# EAGLE board P27_v3 (EAGLE 7.1.0)
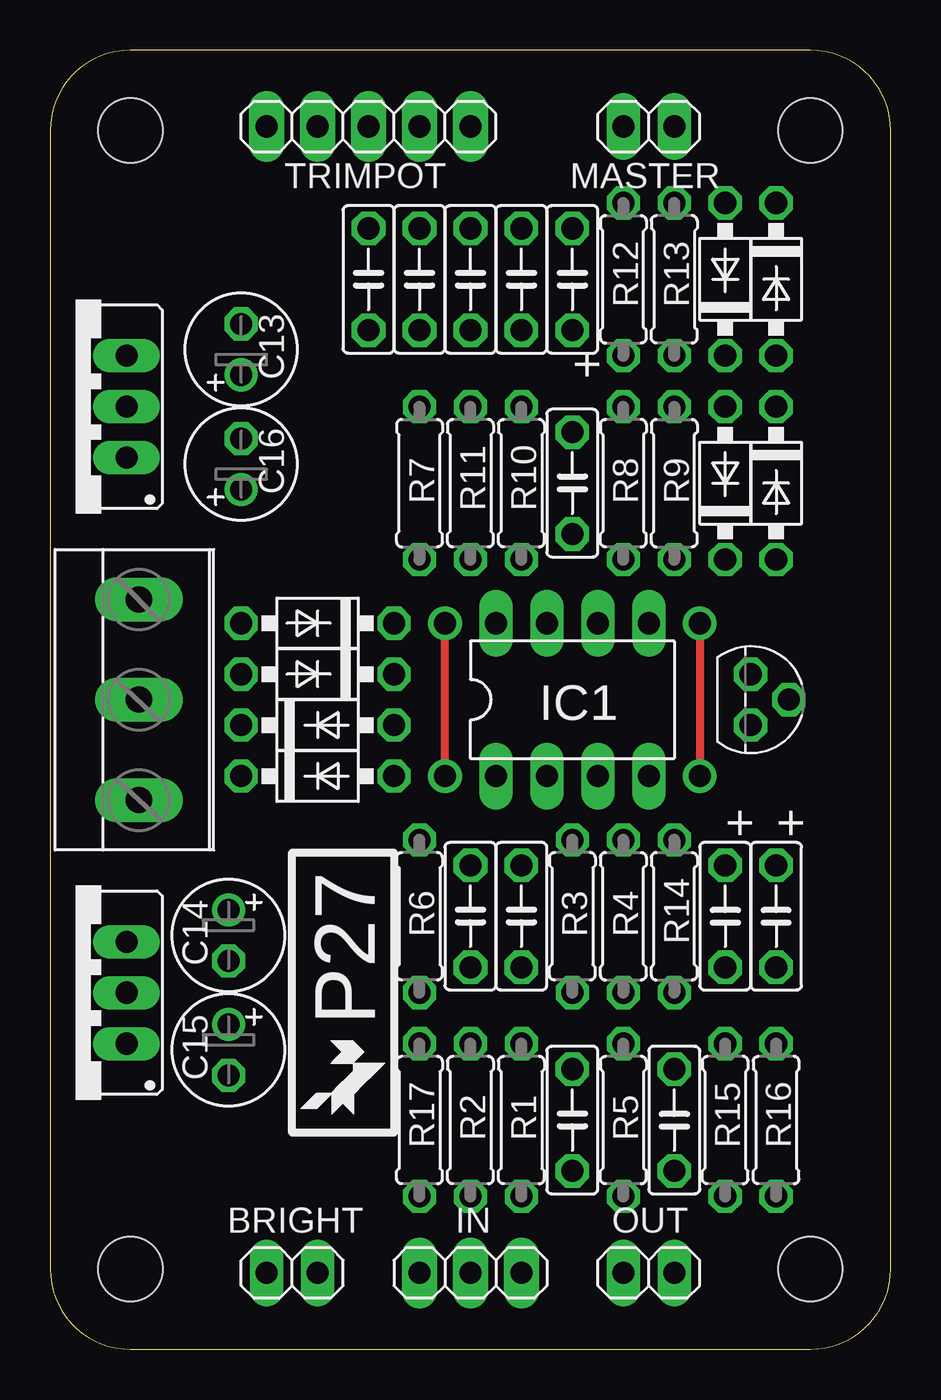
[diagram p0: board, top side]
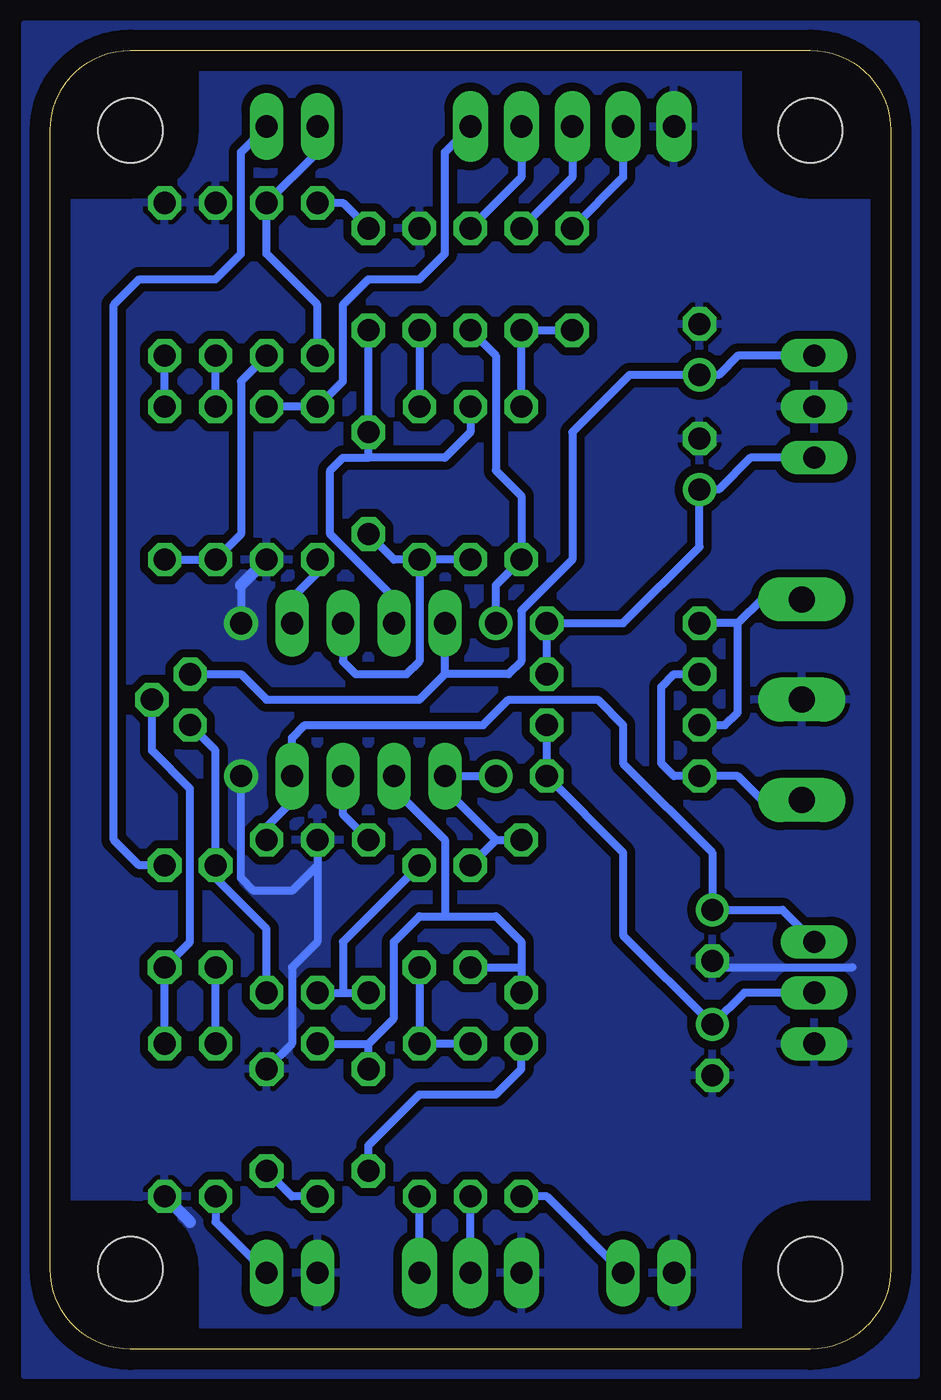
[diagram p1: board, bottom side, seen from below]

Size 41.91 x 64.77 mm. Coordinates in mm from the lower left corner, seen from the top.
Outline: 4,0 37.91,0 arc90 41.91,4 41.91,60.76 arc90 37.91,64.77 4,64.77 arc90 0,60.76 0,4 arc90 4,0
Copper layers (1*16): Top 0.035mm / dielectric 1.5mm / Bottom 0.035mm
Design rules "default": minimum track width 10mil, minimum drill 24mil, track to track 8mil, track to pad 8mil, pad to pad 8mil, via to via 8mil, smd to smd 8mil, copper to edge 40mil, drill to drill 8mil, minimum pad ring 10mil, minimum via ring 8mil, stop-mask expansion 4mil, vias tented up to drill 0mil, thermal gap 10mil
Holes 3.2 mm at 4,4 37.91,4 37.91,60.76 4,60.76
tKeepout: 8 lines
bKeepout: 6 lines
tRestrict: area 0,57.8 to 7,64.8; area 0,0 to 7,7; area 34.9,0 to 41.9,7; area 34.9,57.8 to 41.9,64.8
bRestrict: area 0,57.8 to 7,64.8; area 0,0 to 7,7; area 34.9,0 to 41.9,7; area 34.9,57.8 to 41.9,64.8
vRestrict: area 0,57.8 to 7,64.8; area 0,0 to 7,7; area 34.9,0 to 41.9,7; area 34.9,57.8 to 41.9,64.8

## Footprints (pad centres in the part's own frame; a part is rotated, then mirrored left to right if it is on the bottom)
1X02 = drill 1.1 pad 1.676 long: 1 -1.27,0; 2 1.27,0
C050-025X075 = drill 1.1 pad 1.676 octagon: 1 -2.54,0; 2 2.54,0
E2,5-6 = drill 1.1: + -1.27,0 | drill 1.1 pad 1.6 octagon: - 1.27,0
DO41-7 = drill 1.1 octagon: A 3.81,0; C -3.81,0
DIL08 = drill 1.1 pad 1.676 long: 1 -3.81,-3.81; 2 -1.27,-3.81; 3 1.27,-3.81; 4 3.81,-3.81; 5 3.81,3.81; 6 1.27,3.81; 7 -1.27,3.81; 8 -3.81,3.81
78XXS = drill 1.1 pad 1.676 long: GND 0,-2.54; IN -2.54,-2.54; OUT 2.54,-2.54
79XXS = drill 1.1 pad 1.676 long: GND -2.54,-2.54; IN 0,-2.54; OUT 2.54,-2.54
1X03 = drill 1.1 pad 1.778 long: 1 -2.54,0; 2 0,0; 3 2.54,0
TO92 = drill 1.1 octagon: 1 1.27,0; 2 0,1.905; 3 -1.27,0
0207/7 = drill 1.1 octagon: 1 -3.81,0; 2 3.81,0
1X05 = drill 1.1 pad 1.778 long: 1 -5.08,0; 2 -2.54,0; 3 0,0; 4 2.54,0; 5 5.08,0
W237-103 = drill 1.3 pad 2.184 long: 1 -5,-1.29; 2 0,-1.29; 3 5,-1.29

## Placement (x,y rotation side)
BRIGHT  [1X02]  12.07,3.81 180 top
C1  47nF  [C050-025X075]  23.5,21.59 90 top
C2  1uF  [C050-025X075]  31.11,11.43 270 top
C3  120pF  [C050-025X075]  20.95,21.59 90 top
C4  1nF  [C050-025X075]  20.95,53.34 90 top
C5  220nF  [C050-025X075]  18.41,53.34 90 top
C6  100nF  [C050-025X075]  15.88,53.34 90 top
C7  1uF  [C050-025X075]  23.5,53.34 90 top
C8  120pF  [C050-025X075]  26.04,43.18 90 top
C9  2.2uF  [C050-025X075]  26.04,53.34 90 top
C10  2.2uF  [C050-025X075]  36.2,21.59 270 top
C11  10uF  [C050-025X075]  33.66,21.59 270 top
C12  22nF  [C050-025X075]  26.04,11.43 90 top
C13  220uF/25V  [E2,5-6]  9.52,49.85 90 top
C14  220uF/25V  [E2,5-6]  8.89,20.64 270 top
C15  220uF/25V  [E2,5-6]  8.89,14.92 270 top
C16  220uF/25V  [E2,5-6]  9.52,44.13 90 top
D1  1N4148  [DO41-7]  33.66,43.18 90 top
D2  1N4148  [DO41-7]  33.66,53.34 90 top
D3  1N4148  [DO41-7]  36.2,43.18 270 top
D4  1N4148  [DO41-7]  36.2,53.34 270 top
D5  1N4007  [DO41-7]  13.34,36.2 180 top
D6  1N4007  [DO41-7]  13.34,33.65 180 top
D7  1N4007  [DO41-7]  13.34,28.57 0 top
D8  1N4007  [DO41-7]  13.34,31.11 0 top
IC1  NE5532P  [DIL08]  26.04,32.38 0 top
IC2  7815  [78XXS]  1.27,46.99 90 top
IC3  7915  [79XXS]  1.27,17.78 90 top
IN  [1X03]  20.95,3.81 0 top
MASTER  [1X02]  29.85,60.96 180 top
OUT  [1X02]  29.85,3.81 180 top
Q1  BC549  [TO92]  34.93,32.38 270 top
R1  22k  [0207/7]  23.5,11.43 90 top
R2  100k  [0207/7]  20.95,11.43 90 top
R3  2k2  [0207/7]  26.04,21.59 90 top
R4  1M  [0207/7]  28.57,21.59 270 top
R5  4k7  [0207/7]  28.57,11.43 90 top
R6  68k  [0207/7]  18.41,21.59 90 top
R7  33k  [0207/7]  18.41,43.18 270 top
R8  2k2  [0207/7]  28.57,43.18 90 top
R9  1M  [0207/7]  31.11,43.18 270 top
R10  4k7  [0207/7]  23.5,43.18 90 top
R11  68k  [0207/7]  20.95,43.18 90 top
R12  4k7  [0207/7]  28.57,53.34 270 top
R13  220  [0207/7]  31.11,53.34 90 top
R14  2k2  [0207/7]  31.11,21.59 270 top
R15  100  [0207/7]  33.66,11.43 90 top
R16  100k  [0207/7]  36.2,11.43 90 top
R17  1k  [0207/7]  18.41,11.43 90 top
TRIMPOT  [1X05]  15.88,60.96 180 top
U$1  [FOX-1]  14.61,13.65 90 top
X1  [W237-103]  5.72,32.38 270 top

## Library data of the parts
BRIGHT C1-C16 D1-D8 IC1-IC3 IN MASTER OUT Q1 R1-R17 TRIMPOT U$1 X1 = P27

## Nets
+12V: C13.+ IC1.8 IC2.OUT Q1.3
-12V: C14.+ IC1.4 IC3.OUT R14.1
AGND: BRIGHT.2 C2.1 C7.2 C13.- C14.- C15.- C16.- D2.A D4.C IC2.GND IC3.GND IN.1 OUT.2 R4.1 R9.2 R16.1 TRIMPOT.5 X1.2
BAS: C5.2 TRIMPOT.3
HI: IN.3 R1.1
IN: C10.1 MASTER.1
LOW: IN.2 R2.1
MID: C6.2 TRIMPOT.4
N$1: C1.1 R1.2 R2.2
N$2: IC1.3 R3.2
N$3: C1.2 R3.1 R4.2
N$4: C3.1 C12.2 IC1.2 R5.2 R6.1
N$5: C2.2 R5.1
N$6: C3.2 C4.1 IC1.1 R6.2 R7.2
N$8: C5.1 C6.1 R7.1
N$11: C10.2 Q1.2 R16.2
N$12: C7.1 R10.2
N$14: IC1.5 R8.1
N$15: C11.1 Q1.1 R14.2
N$16: C11.2 R15.2
N$17: C8.1 IC1.6 R10.1 R11.1
N$18: C8.2 C9.1 IC1.7 R11.2
N$19: OUT.1 R15.1
N$20: C9.2 R12.1
N$22: D1.A D2.C
N$23: D3.C D4.A
N$24: D1.C D3.A R13.1
N$28: D6.A D7.C X1.3
N$29: C12.1 R17.2
N$30: BRIGHT.1 R17.1
N$31: D5.A D8.C X1.1
N$32: C16.+ D5.C D6.C IC2.IN
N$33: C15.+ D7.A D8.A IC3.IN
OUT: MASTER.2 R12.2 R13.2
TRB: C4.2 TRIMPOT.2
VOL: R8.2 R9.1 TRIMPOT.1

## Tracks (layer width: path | path; a pad name or v marks a point on that pad's centre or on a via)
+12V
  Bottom 0.406: Q1.3 32.39,33.65 31.11,32.38 23.5,32.38 22.22,33.65 | 22.22,33.65 IC1.8 22.22,36.83 | IC2.OUT 7.62,49.53 8.57,48.58 C13.+ 13.02,48.58 15.88,45.72 15.88,39.37 18.41,36.83 18.41,34.29 19.05,33.65 22.22,33.65
-12V
  Bottom 0.406: R14.1 31.11,26.04 29.85,27.3 IC1.4 29.85,30.48 29.21,31.11 20.32,31.11 19.05,32.38 14.61,32.38 13.34,31.11 13.34,29.21 8.89,24.77 C14.+ 5.4,21.91 IC3.OUT
AGND  (via drill 1.1 pad 1.68)
  Top 0.406: v32.39,36.2 v32.39,28.57
  Bottom 0.406: C2.1 29.85,15.24 29.85,19.05 28.57,20.32 R4.1 28.57,24.13 29.85,22.86 31.75,22.86 32.39,23.5 v32.39,28.57 | C14.- 8.89,19.68 8.25,19.05 1.91,19.05 | 32.39,38.1 v32.39,36.2
  Bottom 0.61: R16.1 34.93,6.35 | R9.2 32.39,38.1
  pour Bottom (isolate 0.406): -1.27,-1.27 -1.27,66.04 43.18,66.04 43.18,-1.27
BAS
  Bottom 0.406: TRIMPOT.3 15.88,58.42 C5.2
HI
  Bottom 0.406: IN.3 R1.1
IN
  Bottom 0.406: C10.1 37.47,24.13 38.73,25.4 38.73,52.07 37.47,53.34 33.66,53.34 32.39,54.61 32.39,59.69 MASTER.1
LOW
  Bottom 0.406: IN.2 R2.1
MID
  Bottom 0.406: TRIMPOT.4 13.34,58.42 C6.2
N$1
  Bottom 0.406: C1.1 R1.2 R2.2
N$2
  Bottom 0.406: R3.2 27.3,26.67 IC1.3
N$3
  Bottom 0.406: C1.2 27.3,20.32 27.3,17.78 | 27.3,17.78 R3.1 | R4.2 27.3,17.78
N$4
  Bottom 0.406: C12.2 26.04,15.24 | 26.04,15.24 24.77,16.51 24.77,20.32 23.5,21.59 22.22,21.59 | 22.22,21.59 19.68,21.59 18.41,20.32 18.41,19.05 | 18.41,19.05 R6.1 | C3.1 18.41,19.05 | IC1.2 24.77,27.94 22.22,25.4 22.22,21.59 | R5.2 26.04,15.24
N$5
  Bottom 0.406: R5.1 29.85,7.62 C2.2
N$6  (via drill 1.1 pad 1.68)
  Top 0.406: v19.68,28.57 v19.68,36.2
  Bottom 0.406: C3.2 19.68,25.4 | 19.68,25.4 R6.2 | 19.68,25.4 22.22,27.94 IC1.1 v19.68,28.57 | C4.1 19.68,49.53 19.68,43.81 18.41,42.54 R7.2 19.68,38.1 v19.68,36.2
N$8
  Bottom 0.406: R7.1 C5.1 C6.1
N$11
  Bottom 0.406: Q1.2 36.83,29.84 34.93,27.94 34.93,20.32 C10.2 R16.2
N$12
  Bottom 0.406: C7.1 R10.2
N$14
  Bottom 0.406: R8.1 28.57,38.73 29.85,37.46 IC1.5
N$15
  Bottom 0.406: R14.2 31.11,20.96 33.66,23.5 C11.1 33.66,29.84 Q1.1
N$16
  Bottom 0.406: R15.2 C11.2
N$17
  Bottom 0.406: IC1.6 27.3,34.29 26.67,33.65 24.13,33.65 23.5,34.29 R10.1 | R11.1 R10.1 | R10.1 24.77,39.37 C8.1
N$18
  Bottom 0.406: R11.2 20.95,45.72 22.22,44.45 26.04,44.45 | 26.04,44.45 C8.2 C9.1 | IC1.7 24.77,37.46 27.94,40.64 27.94,43.81 27.3,44.45 26.04,44.45
N$19
  Bottom 0.406: R15.1 33.66,6.35 OUT.1
N$20
  Bottom 0.406: R12.1 27.3,57.15 C9.2
N$22
  Bottom 0.406: D1.A D2.C
N$23
  Bottom 0.406: D3.C D4.A
N$24
  Bottom 0.406: D3.A D1.C 32.39,40.64 32.39,48.26 R13.1
N$28
  Bottom 0.406: D6.A 10.8,33.65 11.43,33.02 11.43,29.21 10.8,28.57 D7.C 7.62,28.57 6.43,27.39 X1.3
N$29
  Bottom 0.406: C12.1 26.04,10.16 23.5,12.7 19.68,12.7 18.41,13.97 R17.2
N$30
  Bottom 0.406: BRIGHT.1 17.14,7.62 R17.1
N$31
  Bottom 0.406: D8.C 8.25,31.11 7.62,31.75 7.62,36.2 | 7.62,36.2 D5.A | X1.1 6.43,37.38 7.62,36.2
N$32
  Bottom 0.406: D6.C D5.C 13.34,36.2 9.52,40 C16.+ 8.57,42.86 6.99,44.45 IC2.IN
N$33
  Bottom 0.406: D8.A D7.A 13.34,24.77 13.34,20.64 C15.+ 7.3,17.78 IC3.IN
OUT
  Bottom 0.406: R12.2 28.57,52.07 31.11,54.61 R13.2 28.57,59.69 MASTER.2
TRB
  Bottom 0.406: TRIMPOT.2 18.41,58.42 C4.2
VOL
  Bottom 0.406: R9.1 R8.2 27.3,48.26 27.3,52.07 26.04,53.34 23.5,53.34 22.22,54.61 22.22,59.69 TRIMPOT.1

## Text on the board
tPlace: + | + | +
tNames: P27